# Altium PCB m13temp.PcbDoc
Units mil, origin at the board's own origin, x right, y up, seen from the top; angles counter-clockwise.
Board outline 2000 x 2600 mil, 2 copper layers (Top Layer, Bottom Layer); 29 components, 52 nets, 118 pads, 16 vias.
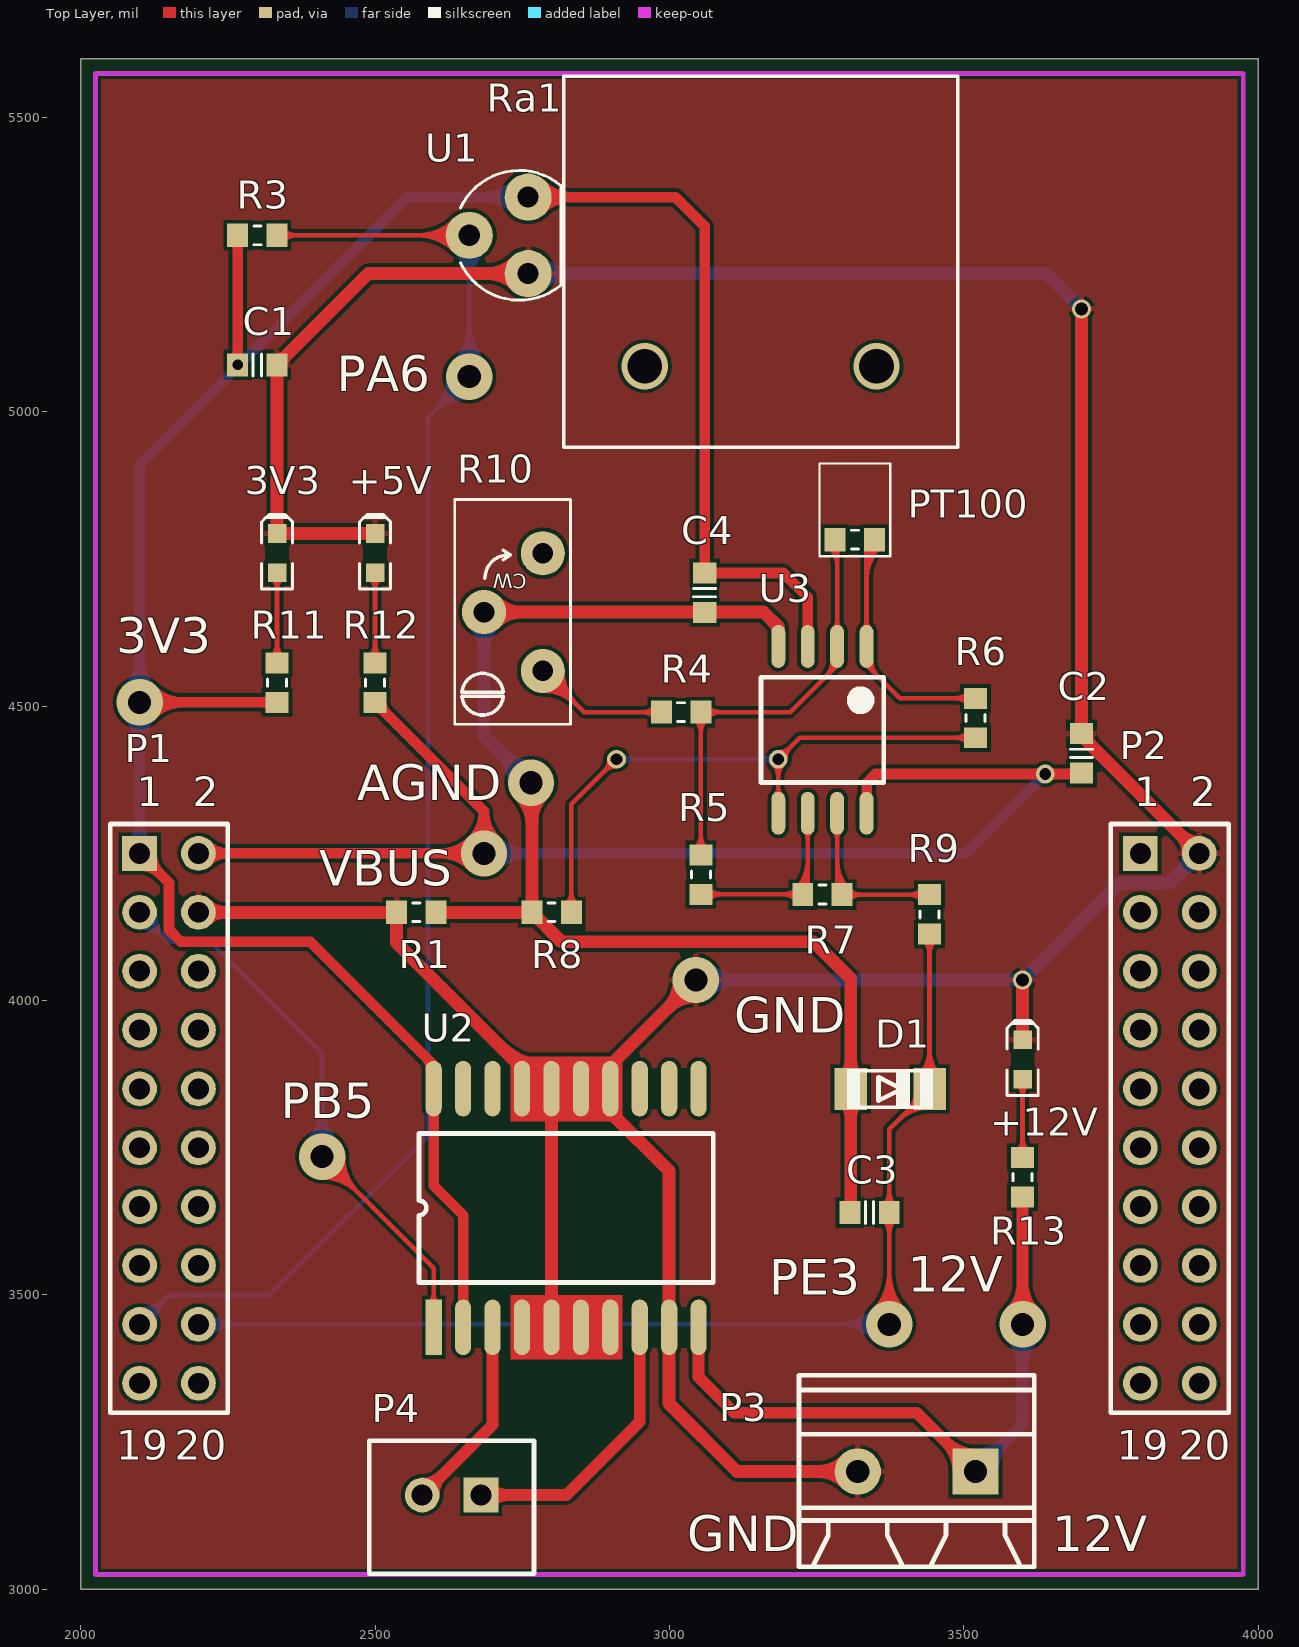
[diagram p0: Top Layer view]
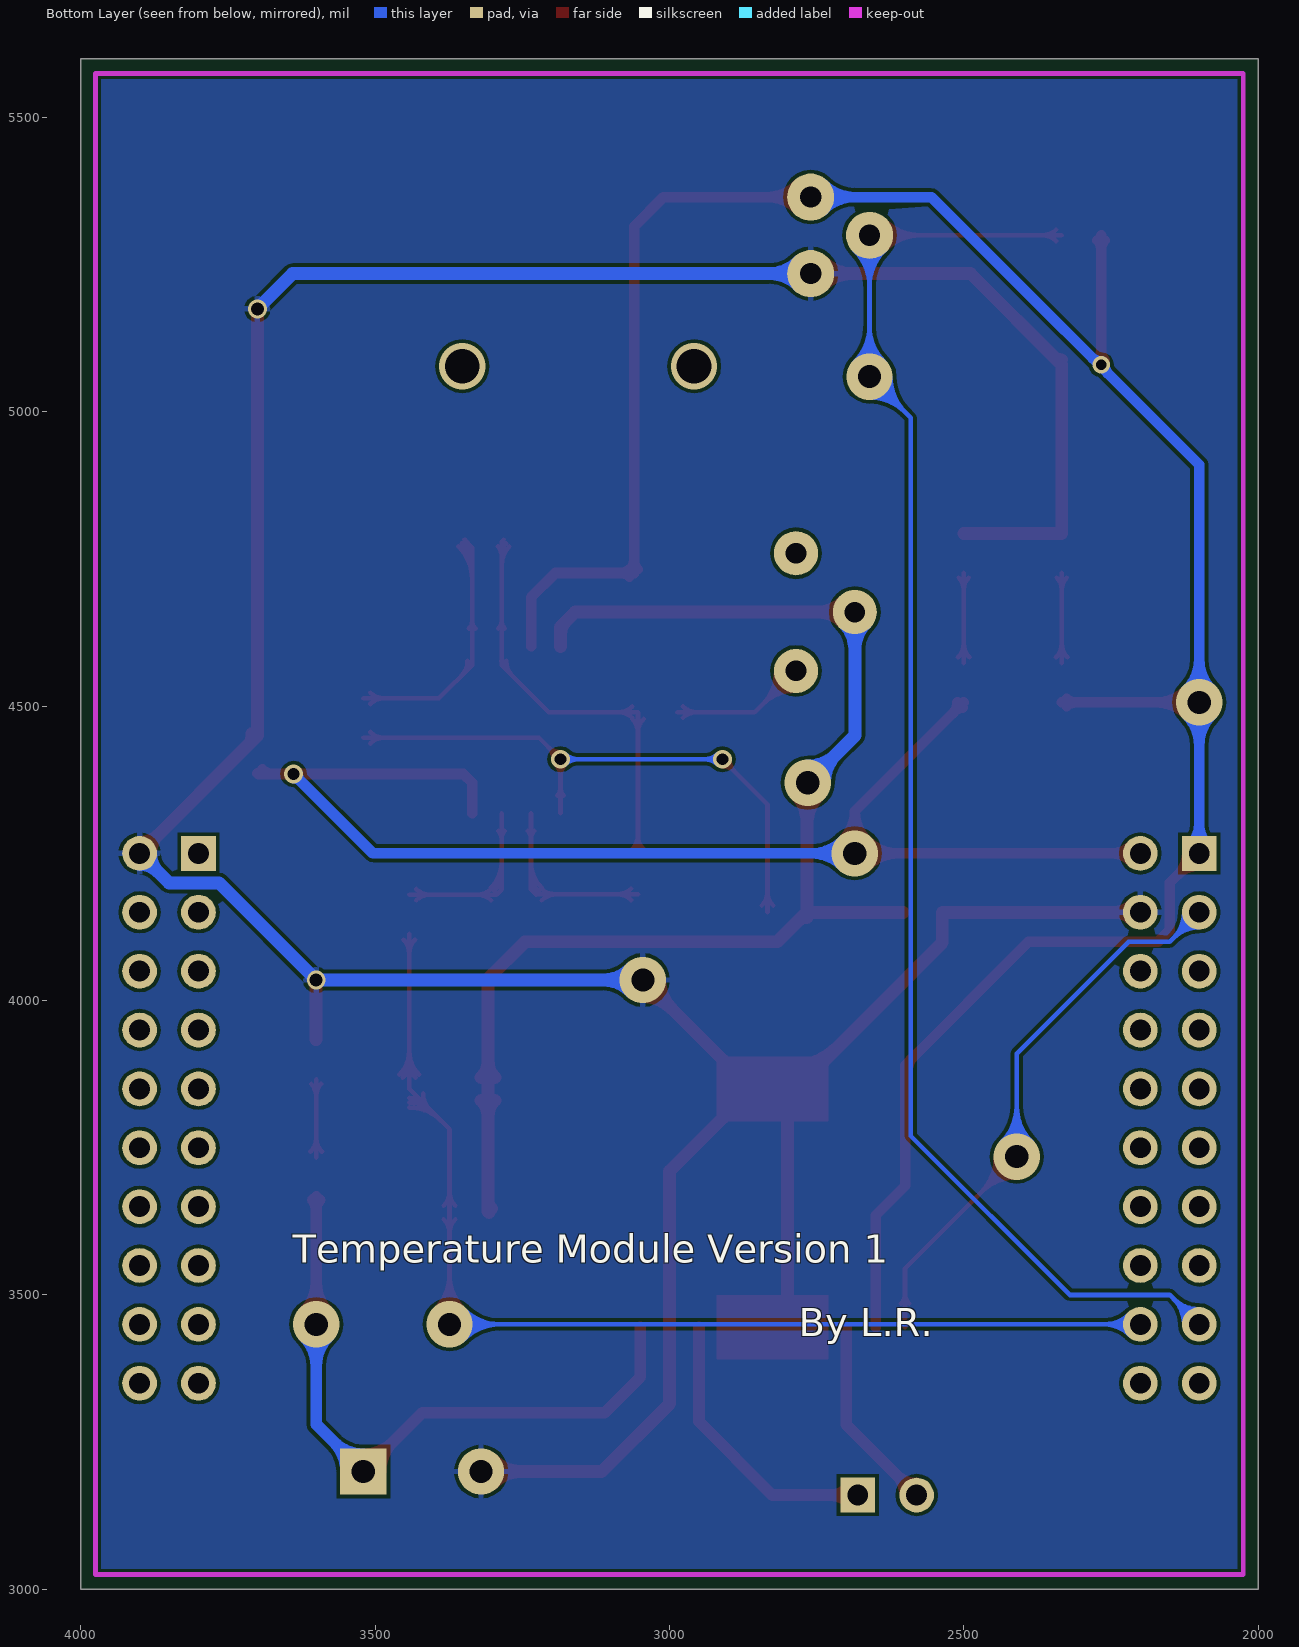
[diagram p1: Bottom Layer view, seen from below]
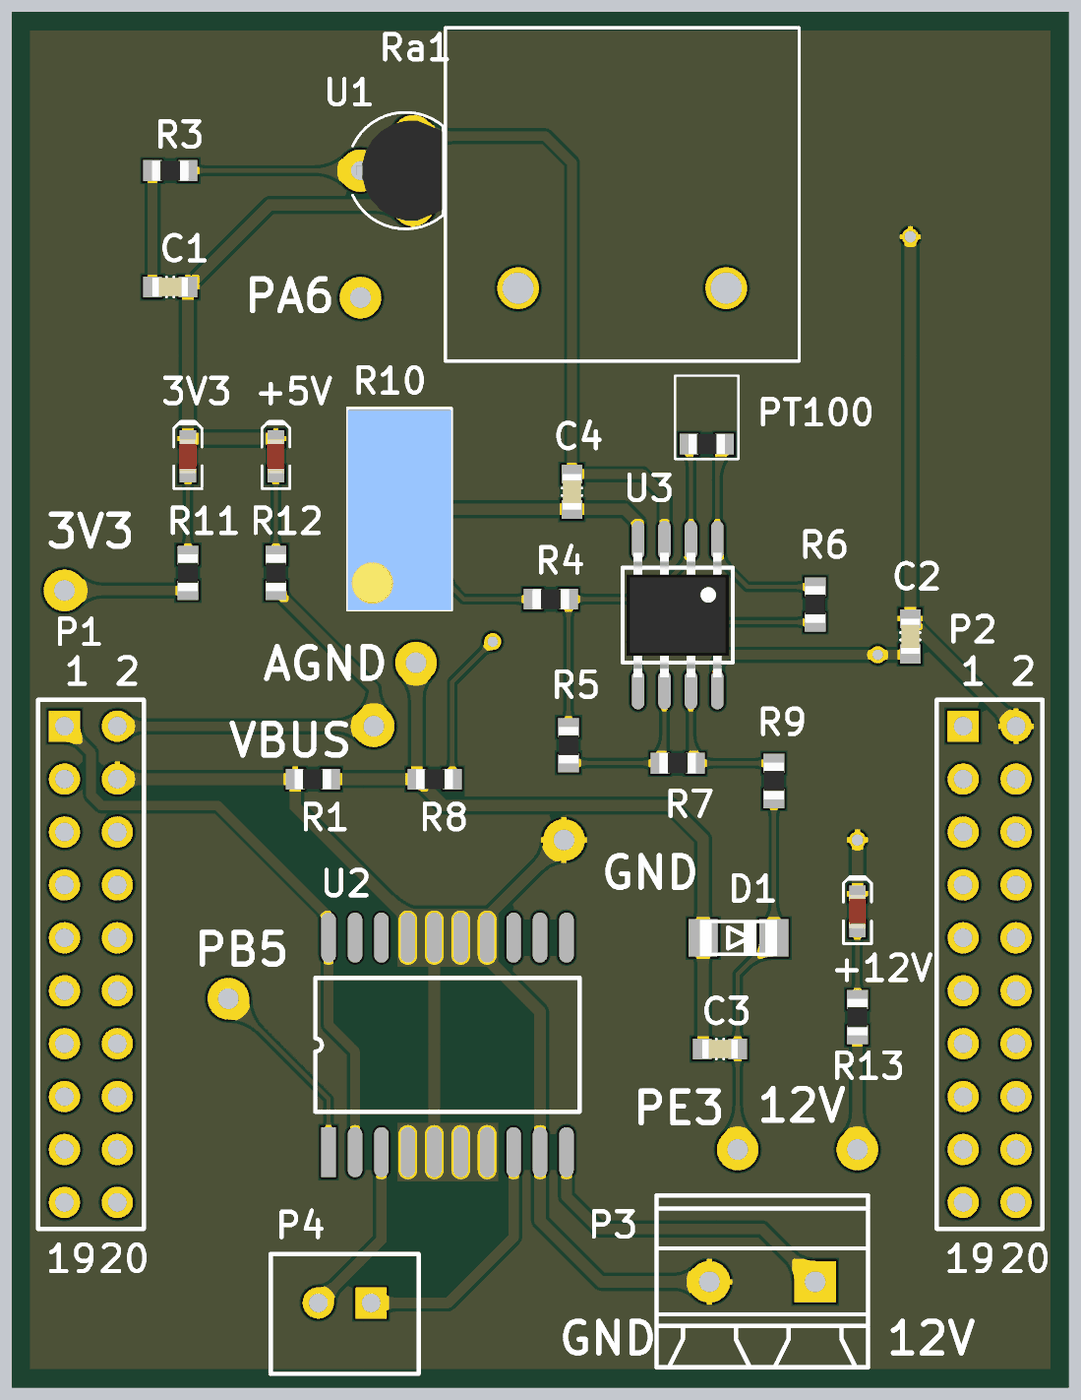
[diagram p2: 3D render of the assembled board from above, using the file's embedded part models]

## Layer stack, top to bottom
Top Layer: signal copper 1.4
Dielectric: dielectric 12.6, FR-4, Dk 4.8
Bottom Layer: signal copper 1.4

## Board outline
2000,3000 4000,3000 4000,5600 2000,5600

## Design rules (kind name [scope] priority, off if disabled: settings)
Clearance [All] p1: gap=6
PolygonConnect [All] p1: connectstyle=Relief reliefconductorwidth=10 reliefentries=4 polygonreliefangle="90 Angle"
RoutingVias VSS [(InNet('AGND') OR InNet('GND'))] p1: holewidth=22 width=32 viastyle="Through Hole" minholewidth=20 minwidth=32 maxholewidth=40 maxwidth=80
RoutingVias 5V [(InNet('3V3') OR InNet('OUT1') OR InNet('OUT2') OR InNet('V12') OR InNet('VBUS'))] p2: holewidth=18 width=30 viastyle="Through Hole" minholewidth=18 minwidth=30 maxholewidth=40 maxwidth=80
RoutingVias [All] p3: holewidth=12 width=24 viastyle="Through Hole" minholewidth=12 minwidth=24 maxholewidth=40 maxwidth=80
SilkscreenOverComponentPads [All] p1: minsilkscreentomaskgap=10
SolderMaskExpansion [All] p1: expansion=4
Width V12 [(InNet('V12') OR InNet('OUT1') OR InNet('OUT2'))] p1: maxlimit=20 minlimit=20 preferedwidth=20
Width GND [(InNet('AGND') OR InNet('GND'))] p2: maxlimit=22 minlimit=22 preferedwidth=22
Width VCC [(InNet('3V3') OR InNet('VBUS'))] p3: maxlimit=18 minlimit=11 preferedwidth=18
Width [All] p4: maxlimit=8 minlimit=8 preferedwidth=8
27 further rules are at their usual default settings.

## Components (designator, comment, footprint, x,y, rotation, side; value= is the part's Value field where it differs from the comment)
3V3 "LED2" LED_0603_RED 2333.47,4760 r90 top
+5V "LED2" LED_0603_RED 2500,4760 r90 top
+12V "LED2" LED_0603_RED 3600,3900 r90 top
C1 "Cap Semi" CAP_0603 2300,5080 r180 top
C2 "Cap Semi" CAP_0603 3700,4420 r90 top
C3 "Cap Semi" CAP_0603 3340,3640 r0 top
C4 "Cap Semi" CAP_0603 3060,4693 r270 top
D1 "1N4728" DIAO 3380,3860 r180 top
P1 "Header 10X2" HDR2X10 2100,4250 r270 top
P2 "Header 10X2" HDR2X10 3800,4250 r270 top
P3 "Header 2" MKDSN_2RMI 3520,3200 r180 top
P4 "Header2" XPH2 2680,3160 r180 top
PT100 "PT100" PT100 3280,4780 r0 top
R1 "Res Semi" RES_0603 2570,4150 r0 top
R3 "Res Semi" RES_0603 2300,5300 r0 top
R4 "Res Semi" RES_0603 3020,4490 r180 top
R5 "Res Semi" RES_0603 3053.47,4214 r270 top
R6 "Res Semi" RES_0603 3520,4480 r270 top
R7 "Res Semi" RES_0603 3260,4180 r0 top
R8 "Res Semi" RES_0603 2800,4150 r0 top
R9 "Res Semi" RES_0603 3441.93,4146.5 r90 top
R10 "Res_Trimmer" RES_TRIMMER 2785,4560 r180 top
R11 "Res Semi" RES_0603 2333.47,4540 r90 top
R12 "Res Semi" RES_0603 2500,4540 r90 top
R13 "Res Semi" RES_0603 3600,3700 r90 top
Ra1 "Radiation" Radiation 2840,4940 r0 top
U1 "DS18B20" TO-92 2760,5300 r180 top
U2 "L293DD" SOP20 2600,3445 r90 top
U3 "LM358DR" SOIC_8 3260,4460 r270 top

## Footprints (in the part's own frame and the unit in brackets; to place one, negate y for a bottom-side part, rotate by r counter-clockwise, add the part's x,y. Pads: shape width x height; smd on the part's side, far side on the other; paste and mask are expansions set on the pad)
CAP_0603 [mm]
  rect 0.9x1 smd: 1(-0.85,0) 2(0.85,0)
  Top Layer pour cut-out: -0.4,0.6 0.4,0.6 0.4,-0.6 -0.4,-0.6
  silkscreen extent -0.18,-0.48 0.18,0.48, body extent -0.85,-0.45 0.85,0.45, height 0.89
DIAO [mm]
  rect 1.4x1.8 smd: 1(1.827,0.254) 2(-1.573,0.254)
  silkscreen extent -1.73,-0.61 1.98,1.12
HDR2X10 [mm] "Connector; Header; 10x2 Position"
  rect 1.5x1.5 hole 0.9: 1(0,0)
  round 1.5 hole 0.9: 2(0,2.54) 3(2.54,0) 4(2.54,2.54) 5(5.08,0) 6(5.08,2.54) 7(7.62,0) 8(7.62,2.54) 9(10.16,0) 10(10.16,2.54) 11(12.7,0) 12(12.7,2.54) 13(15.24,0) 14(15.24,2.54) 15(17.78,0) 16(17.78,2.54) 17(20.32,0) 18(20.32,2.54) 19(22.86,0) 20(22.86,2.54)
  silkscreen extent -1.27,-1.27 24.13,3.81
LED_0603_RED [mm]
  rect 0.8x0.8 smd: 1(-0.85,0) 2(0.85,0)
  Top Layer pour cut-out: -0.5,0.5 0.5,0.5 0.5,-0.5 -0.5,-0.5
  silkscreen extent -1.55,-0.68 1.68,0.67, body extent -0.8,-0.4 0.8,0.4, height 0.75
MKDSN_2RMI [mm]
  rect 2x2 hole 1: 1(0,0)
  round 2 hole 1: 2(5.08,0)
  silkscreen extent -2.54,-4.15 7.62,4.11
PT100 [mm]
  rect 0.9x1 smd: 1(0.039,0.076) 2(1.739,0.076)
  Top Layer pour cut-out: 0.489,0.676 1.289,0.676 1.289,-0.524 0.489,-0.524
  silkscreen extent -0.64,-0.64 2.41,3.36, body extent 0.01,-0.4 1.76,0.55, height 0.54
Radiation [mil]
  silkscreen extent -20,0 650,630
RES_0603 [mm]
  rect 0.9x1 smd: 1(-0.85,0) 2(0.85,0)
  Top Layer pour cut-out: -0.4,0.6 0.4,0.6 0.4,-0.6 -0.4,-0.6
  silkscreen extent -0.15,-0.41 0.15,0.41, body extent -0.87,-0.47 0.88,0.48, height 0.54
RES_TRIMMER [mil] "TRIMMER, MURATA, PV36Y"
  round 75 hole 35: 1(0,0) 2(100,-100) 3(0,-200)
  silkscreen extent -47,-291 150,91, body extent -47,-287 150,91, height 445
SOIC_8 [mm] "SOIC, 8-Leads, Body 5.3x5.4mm (max), Pitch 1.27mm, IPC Medium Density"
  oval 1.85x0.6 smd: 1(-3.6,1.905) 2(-3.6,0.635) 3(-3.6,-0.635) 4(-3.6,-1.905) 5(3.6,-1.905) 6(3.6,-0.635) 7(3.6,0.635) 8(3.6,1.905)
  silkscreen extent -2.28,-2.65 2.27,2.65, body extent -3,-2.45 3,2.45, height 1.75
SOP20 [mm]
  rect 2.4x0.7 smd: 1(0,0.01)
  oval 2.4x0.7 smd: 2(0,-1.26) 3(0,-2.53) 4(0,-3.8) 5(0,-5.07) 6(0,-6.34) 7(0,-7.61) 8(0,-8.88) 9(0,-10.15) 10(0,-11.42) 11(10.3,-11.42) 12(10.3,-10.15) 13(10.3,-8.88) 14(10.3,-7.61) 15(10.3,-6.34) 16(10.3,-5.07) 17(10.3,-3.8) 18(10.3,-2.53) 19(10.3,-1.26) 20(10.3,0.01)
  silkscreen extent 1.93,-12.06 8.37,0.64
TO-92 [mil]
  round 80 hole 36: 1(0,65) 2(100,0) 3(0,-65)
  silkscreen extent -56,-110 115,110, body extent -55,-95 107,95, height 405
XPH2 [mm]
  rect 1.5x1.5 hole 0.9: 1(0,0)
  round 1.5 hole 0.9: 2(2.54,0)
  silkscreen extent -2.29,-2.35 4.83,3.4

## Part data
3V3 +5V +12V: "Typical RED, GREEN, YELLOW, AMBER GaAs LED"
C1 C2 C3 C4: "Capacitor (Semiconductor SIM Model)"
D1: library part "Diode 1N4148", "High Conductance Fast Diode"
P1 P2: "Header, 10-Pin, Dual row"
P3: "Header, 2-Pin"
PT100: library part "Res Adj1", "Variable Resistor"
R1 R3 R4 R5 R6 R7 R8 R9 R11 R12 R13: "Semiconductor Resistor"
R10: "Resistor"
U1: "Programmable Resolution  1-Wire Digital Thermometer"
U2: "L293DD MOTOR"
U3: "Dual Operational Amplifiers"

## Via types
v1: diameter 78.74, hole 39.37, Top Layer to Bottom Layer, 8 vias
v2: diameter 32, hole 20, Top Layer to Bottom Layer, 3 vias
v3: diameter 32, hole 22, Top Layer to Bottom Layer, 2 vias
v4: diameter 78.74, hole 59.06, Top Layer to Bottom Layer, 2 vias
v5: diameter 30, hole 18, Top Layer to Bottom Layer, 1 vias

## Nets (pads, with @x,y where several pads share a name; then routed paths per layer and width w, separated by ;. In a path a pad name is that pad's centre, name@x,y a point inside that pad or via, vN(x,y) a via of type N, cw(c..) or ccw(c..) an arc to the next point about the centre after c; other vN are vias at no path point)
3V3: C1.2 C4.1 P1.1 R3.1 R11.1 U1.3 U2.2 U2.20 U3.3 | length 5273.9
  Top Layer w18: P1.1@2100,4229.47 cw(c2100,4179.91) 2135.04,4214.96 cw(c2170.09,4250) P1.1@2120.53,4250 ; P1.1 2150,4200 2150,4120 2170,4100 2390,4100 2599.61,3890.39 U2.20 2599.61,3685.39 2649.61,3635.39 U2.2 ; v1(2100,4506.53) R11.1 ; v1@2121.47,4485.06 cw(c2173.32,4433.22) 2173.32,4506.54 cw(c2173.32,4579.85) v1@2121.47,4528.01 ; C1.2@2260.37,5088.13 ccw(c2245.49,5103.01) 2266.53,5103.01 ccw(c2287.58,5103.01) C1.2@2272.7,5088.13 ; R3.1@2260.37,5291.87 cw(c2245.49,5276.99) 2266.53,5276.99 cw(c2287.58,5276.99) R3.1@2272.7,5291.87 ; v5(2266.54,5080) R3.1 ; R11.1@2325.33,4500.37 ccw(c2310.45,4485.49) 2310.45,4506.53 ccw(c2310.45,4527.58) R11.1@2325.33,4512.7 ; 2586.91,3903.09 cw(c2567.8,3883.98) U2.20@2594.83,3883.98 ; U1.3@2755,5370 U1.3 3010,5365 3060,5315 C4.1 3193.53,4726.47 3235,4685 U3.3 ; U1.3@2781.92,5343.08 cw(c2834.84,5290.16) 2834.84,5365 cw(c2834.84,5439.84) U1.3@2781.92,5386.92 ; C4.1@3053.84,4732.63 ccw(c3038.96,4747.51) 3060,4747.51 ccw(c3081.04,4747.51) C4.1@3066.16,4732.63 ; C4.1@3068.13,4720.3 cw(c3083.01,4705.42) 3083.01,4726.47 cw(c3083.01,4747.51) C4.1@3068.13,4732.63
  Bottom Layer w18: v1@2078.53,4485.06 cw(c2026.68,4433.22) 2100,4433.22 cw(c2173.32,4433.22) v1@2121.47,4485.06 ; v1@2078.53,4528.01 ccw(c2026.68,4579.85) 2100,4579.85 ccw(c2173.32,4579.85) v1@2121.47,4528.01 ; P1.1@2085.48,4264.52 ccw(c2050.44,4299.56) 2100,4299.56 ccw(c2149.56,4299.56) P1.1@2114.52,4264.52 ; P1.1 v1(2100,4506.53) 2100,4910 2555,5365 U1.3 ; 2253.84,5063.84 ccw(c2237.69,5080) v5@2260.54,5080 ; v5@2266.54,5086 ccw(c2266.54,5108.85) 2282.69,5092.69 ; U1.3@2738.08,5343.08 ccw(c2685.16,5290.16) 2685.16,5365 ccw(c2685.16,5439.84) U1.3@2738.08,5386.92
AGND: C3.1 C4.2 D1.1 R1.2 R8.1 R10.2 U3.4 | length 2827.3
  Top Layer w22: R1.2 R8.1 ; R10.2 3160,4660 3185,4635 U3.4 ; R10.2@2703.74,4641.26 cw(c2748.98,4596.02) 2748.98,4660 cw(c2748.98,4723.98) R10.2@2703.74,4678.74 ; v1@2744.94,4349.94 cw(c2692.8,4297.8) 2766.53,4297.8 ; R8.1@2766.53,4141.32 cw(c2766.53,4120.35) R8.1@2781.36,4135.17 ; 2766.53,4305.21 cw(c2829.79,4305.21) v1@2785.06,4349.94 ; v1@2766.53,4368.47 R8.1 ; 3177.49,4642.51 cw(c3161.32,4626.34) U3.4@3184.19,4626.34 ; D1.1@3296.36,3830.42 cw(c3268.09,3802.15) 3308.07,3802.15 cw(c3348.05,3802.15) D1.1@3319.78,3830.42 ; D1.1@3296.36,3869.58 ccw(c3268.09,3897.85) 3308.07,3897.85 ccw(c3348.05,3897.85) D1.1@3319.78,3869.58 ; C3.1@3301.79,3646.72 ccw(c3286.61,3661.89) 3308.07,3661.89 ; C3.1 3308.07,3641.54 D1.1 3308.07,4036.93 3245,4100 2816.54,4100 R8.1
  Bottom Layer w22: R10.2@2666.26,4641.26 cw(c2621.02,4596.02) 2685,4596.02 cw(c2748.98,4596.02) R10.2@2703.74,4641.26 ; R10.2 2685,4450 v1(2765,4370) ; v1@2736.63,4370 ccw(c2668.14,4370) 2716.57,4418.43 ccw(c2765,4466.86) v1@2765,4398.37
GND: 3V3.2 +5V.2 +12V.2 C1.1 C2.2 P1.4 P2.2 P3.2 R1.1 U1.1 U2.4 U2.5 U2.6 U2.7 U2.9 U2.14 U2.15 U2.16 U2.17 | length 7342.3
  Top Layer w22: P1.4 R1.1 2536.53,4098.47 2784.49,3850.51 U2.16 U2.5 ; P1.4@2213.1,4136.9 cw(c2244.73,4105.27) 2244.73,4150 cw(c2244.73,4194.73) P1.4@2213.1,4163.1 ; C1.1@2333.47,5088.68 ccw(c2333.47,5109.65) C1.1@2348.29,5094.83 ; +5V.2 3V3.2 C1.1 2488.47,5235 U1.1 ; 2711.92,3923.08 ccw(c2799.61,4010.76) U2.16@2799.61,3886.76 ; U1.1@2739.49,5214.49 ccw(c2689.99,5164.99) 2689.99,5235 ccw(c2689.99,5305.01) U1.1@2739.49,5255.51 ; U2.17@2740.21,3890.65 cw(c2741.62,3884.61) U2.17@2746.01,3888.99 ; U2.17@2745.22,3869.23 cw(c2752.23,3839.3) 2773.97,3861.03 ; U2.17@2749.48,3885.52 ccw(c2799.61,3935.64) U2.16@2799.61,3864.76 ; U2.16@2787.04,3847.96 ccw(c2799.61,3860.53) U2.16@2799.61,3842.76 ; U2.14@2902.39,3817.05 ccw(c2925.16,3817.05) 2909.06,3800.94 ; U2.14@2902.39,3883.98 cw(c2922.69,3883.98) 2908.33,3898.33 ; v1@3016.63,4035 cw(c2948.14,4035) 2996.57,3986.57 cw(c3045,3938.14) v1@3045,4006.63 ; v1(3045,4035) 2899.61,3889.61 U2.14 2899.61,3810.39 2999.61,3710.39 U2.9 2999.61,3315.39 3115,3200 P3.2 ; P3.2@3299.94,3179.94 ccw(c3251.51,3131.51) 3251.51,3200 ccw(c3251.51,3268.49) P3.2@3299.94,3220.06 ; +12V.2 v3(3600,4035) ; v3(3700,5175) 3700,4450 P2.2 ; C2.2@3708.68,4453.46 ccw(c3738.01,4453.46) 3717.27,4432.73 ; P2.2@3881.47,4250 ccw(c3836.74,4250) 3868.37,4281.63 ccw(c3900,4313.26) P2.2@3900,4268.53
  Bottom Layer w22: U1.1 3640,5235 v3(3700,5175) ; U1.1@2780.51,5214.49 cw(c2830.01,5164.99) 2830.01,5235 cw(c2830.01,5305.01) U1.1@2780.51,5255.51 ; v1(3045,4035) v3(3600,4035) 3765,4200 3850,4200 P2.2 ; v1@3065.06,4014.94 cw(c3113.49,3966.51) 3113.49,4035 cw(c3113.49,4103.49) v1@3065.06,4055.06 ; P2.2@3881.47,4250 cw(c3836.74,4250) 3868.37,4218.37 cw(c3900,4186.74) P2.2@3900,4231.47
Net3V3_1: 3V3.1 R11.2 | length 249.6
  Top Layer w8: R11.2@2323.77,4583.16 ccw(c2300.34,4606.58) 2333.47,4606.58 ; 3V3.1@2325.16,4718.23 cw(c2305.1,4698.17) 2333.47,4698.17 cw(c2361.83,4698.17) 3V3.1@2341.77,4718.23 ; R11.2 3V3.1 ; 2333.47,4606.57 ccw(c2366.57,4606.57) R11.2@2343.16,4583.16
Net+5V_1: +5V.1 R12.2 | length 249.6
  Top Layer w8: R12.2@2490.3,4583.16 ccw(c2466.88,4606.58) 2500,4606.58 ; +5V.1@2491.69,4718.23 cw(c2471.64,4698.17) 2500,4698.17 cw(c2528.36,4698.17) +5V.1@2508.31,4718.23 ; R12.2 +5V.1 ; 2500,4606.57 ccw(c2533.11,4606.57) R12.2@2509.7,4583.16
Net+12V_1: +12V.1 R13.2 | length 229.6
  Top Layer w8: R13.2@3590.3,3743.16 ccw(c3566.88,3766.58) 3600,3766.58 ; +12V.1@3591.69,3858.23 cw(c3571.64,3838.17) 3600,3838.17 cw(c3628.36,3838.17) +12V.1@3608.31,3858.23 ; R13.2 +12V.1 ; 3600,3766.57 ccw(c3633.11,3766.57) R13.2@3609.7,3743.16
NetPT100_1: PT100.1 R4.1 R5.1 U3.2 | length 1020.9
  Top Layer w8: R5.1@3043.77,4257.16 ccw(c3020.35,4280.58) 3053.47,4280.58 ccw(c3086.58,4280.58) R5.1@3063.16,4257.16 ; R4.1@3043.77,4478.33 cw(c3020.35,4454.92) 3053.47,4454.92 cw(c3086.58,4454.92) R4.1@3063.16,4478.33 ; R5.1 R4.1 3205,4490 3285,4570 U3.2 3285,4779.54 PT100.1 ; R4.1@3063.16,4480.3 cw(c3086.58,4456.88) 3086.58,4490 cw(c3086.58,4523.11) R4.1@3063.16,4499.7 ; 3266.63,4551.63 ccw(c3241.13,4577.13) U3.2@3277.19,4577.13 ; PT100.1@3271.84,4771.33 cw(c3240.06,4739.55) 3285,4739.55 ; PT100.1@3277.49,4776.99 cw(c3259.37,4758.87) 3285,4758.87 ; U3.2@3279.48,4631.86 ccw(c3266.14,4645.2) 3285,4645.2 ccw(c3303.86,4645.2) U3.2@3290.52,4631.86 ; 3280.28,4565.28 ccw(c3268.44,4577.13) U3.2@3285.19,4577.13 ; 3285,4756.28 cw(c3306.29,4756.28) PT100.1@3291.23,4771.33
NetPT100_2: PT100.2 R6.1 U3.1 | length 690.9
  Top Layer w8: U3.1@3329.48,4631.86 ccw(c3316.14,4645.2) 3335,4645.2 ccw(c3353.86,4645.2) U3.1@3340.52,4631.86 ; U3.1@3334.81,4577.13 ccw(c3351.56,4577.13) 3339.72,4565.28 ; 3335,4715.41 cw(c3414.09,4715.41) PT100.2@3358.16,4771.33 ; 3335,4734.72 cw(c3394.77,4734.72) PT100.2@3352.51,4776.99 ; 3335,4754.04 cw(c3375.46,4754.04) PT100.2@3346.85,4782.65 ; U3.1@3342.81,4577.13 ccw(c3378.87,4577.13) 3353.37,4551.63 ; PT100.2 3335,4769.54 U3.1 3335,4570 3391.53,4513.47 R6.1 ; R6.1@3508.33,4503.77 ccw(c3484.92,4480.35) 3484.92,4513.47 ccw(c3484.92,4546.58) R6.1@3508.33,4523.16
NetR4_2: R4.2 R10.1 | length 572.7
  Top Layer w8: R10.1@2785,4526.5 cw(c2785,4445.62) 2842.19,4502.81 cw(c2899.38,4560) R10.1@2818.5,4560 ; R10.1@2785,4534.5 cw(c2785,4472.94) 2828.53,4516.47 cw(c2872.06,4560) R10.1@2810.5,4560 ; R10.1@2785,4542.5 cw(c2785,4500.25) 2814.87,4530.13 cw(c2844.75,4560) R10.1@2802.5,4560 ; R10.1 2855,4490 R4.2 ; R4.2@2976.84,4480.3 ccw(c2953.42,4456.88) 2953.42,4490 ccw(c2953.42,4523.11) R4.2@2976.84,4499.7
NetR5_2: R5.2 R7.1 U3.6 | length 530.2
  Top Layer w8: R5.2 R7.1@3226,4180.54 ; R5.2@3065.13,4170.84 cw(c3088.55,4147.42) 3088.55,4180.54 cw(c3088.55,4213.65) R5.2@3065.13,4190.23 ; 3192.13,4180.54 cw(c3192.13,4145.6) R7.1@3216.84,4170.3 ; 3194.71,4180.54 ccw(c3194.71,4211.83) R7.1@3216.84,4189.7 ; R7.1@3216.84,4191.67 ccw(c3172.98,4235.52) 3235,4235.52 ; R7.1@3222.49,4186.01 ccw(c3192.3,4216.21) 3235,4216.21 ; R7.1 3235,4188.47 U3.6 ; U3.6@3229.48,4288.14 cw(c3216.14,4274.8) 3235,4274.8 cw(c3253.86,4274.8) U3.6@3240.52,4288.14
NetR6_2: R6.2 R8.2 U3.5 | length 1369.8
  Top Layer w8: R8.2@2823.77,4161.67 ccw(c2800.35,4185.08) 2833.46,4185.08 ccw(c2866.58,4185.08) R8.2@2843.16,4161.67 ; R8.2 2833.46,4333.46 v2(2910,4410) ; v2@2898,4410 cw(c2869.03,4410) 2889.51,4389.51 cw(c2910,4369.03) v2@2910,4398 ; v2@3176.51,4401.51 cw(c3156.03,4381.03) 3185,4381.03 cw(c3213.97,4381.03) v2@3193.49,4401.51 ; U3.5@3179.48,4348.4 ccw(c3166.14,4361.73) 3185,4361.73 ccw(c3203.86,4361.73) U3.5@3190.52,4348.4 ; U3.5 v2(3185,4410) 3221.54,4446.54 R6.2 ; v2@3185,4422 ccw(c3185,4450.97) 3205.49,4430.49 ccw(c3225.97,4410) v2@3197,4410 ; R6.2@3508.33,4436.84 ccw(c3484.92,4413.42) 3484.92,4446.54 ccw(c3484.92,4479.65) R6.2@3508.33,4456.23
  Bottom Layer w8: v2(2910,4410) v2(3185,4410) ; v2@2918.49,4401.51 cw(c2938.97,4381.03) 2938.97,4410 cw(c2938.97,4438.97) v2@2918.49,4418.49 ; v2@3176.51,4401.51 ccw(c3156.03,4381.03) 3156.03,4410 ccw(c3156.03,4438.97) v2@3176.51,4418.49
NetR7_2: R7.2 R9.2 U3.7 | length 506.1
  Top Layer w8: U3.7@3279.48,4288.14 cw(c3266.14,4274.8) 3285,4274.8 cw(c3303.86,4274.8) U3.7@3290.52,4288.14 ; 3285,4216.21 ccw(c3327.7,4216.21) R7.2@3297.51,4186.01 ; 3285,4235.52 ccw(c3347.02,4235.52) R7.2@3303.16,4191.67 ; U3.7 3285,4188.47 R7.2 R9.2 ; R7.2@3303.16,4170.3 cw(c3326.58,4146.89) 3326.58,4180 cw(c3326.58,4213.12) R7.2@3303.16,4189.7 ; 3406.76,4180 cw(c3406.76,4146.76) R9.2@3430.26,4170.27 ; 3406.93,4180 ccw(c3406.93,4212.99) R9.2@3430.26,4189.66
OUT1: P4.2 U2.3 | length 408.6
  Top Layer w20: P4.2 2699.61,3279.61 U2.3 ; P4.2@2580,3179.53 ccw(c2580,3226.67) 2613.34,3193.34 ccw(c2646.67,3160) P4.2@2599.53,3160
OUT2: P4.1 U2.8 | length 555.7
  Top Layer w20: P4.1 2825,3160 2949.61,3284.61 U2.8 ; P4.1@2693.81,3146.19 cw(c2727.14,3112.86) 2727.14,3160 cw(c2727.14,3207.14) P4.1@2693.81,3173.81
PA2: P2.20
PA3: P2.18
PA4: P2.16
PA5: P1.15
PA6: P1.17 R3.2 U1.2 | length 3983.2
  Top Layer w8: R3.2 U1.2 ; R3.2@2343.16,5290.3 cw(c2366.58,5266.89) 2366.58,5300 cw(c2366.58,5333.12) R3.2@2343.16,5309.7 ; U1.2@2634.54,5274.54 ccw(c2573.09,5213.09) 2573.09,5300 ccw(c2573.09,5386.91) U1.2@2634.54,5325.46 ; U1.2@2640.2,5280.2 ccw(c2592.4,5232.4) 2592.4,5300 ccw(c2592.4,5367.6) U1.2@2640.2,5319.8 ; U1.2@2645.86,5285.86 ccw(c2611.71,5251.71) 2611.71,5300 ccw(c2611.72,5348.28) U1.2@2645.86,5314.14
  Bottom Layer w8: P1.17 2150,3500 2320,3500 2590,3770 2590,4990 v1(2660,5060) U1.2 ; P1.17@2100,3467.53 ccw(c2100,3509.84) 2129.92,3479.92 ccw(c2159.84,3450) P1.17@2117.53,3450 ; P1.17@2100,3475.53 ccw(c2100,3537.16) 2143.58,3493.58 ccw(c2187.16,3450) P1.17@2125.53,3450 ; v1@2624.63,5060 cw(c2539.24,5060) 2599.62,4999.62 cw(c2660,4939.24) v1@2660,5024.63 ; v1@2632.63,5060 cw(c2566.55,5060) 2613.28,5013.28 cw(c2660,4966.55) v1@2660,5032.63 ; U1.2@2634.54,5274.54 cw(c2573.09,5213.09) 2660,5213.09 cw(c2746.91,5213.09) U1.2@2685.46,5274.54 ; v1@2634.99,5085.01 ccw(c2574.61,5145.39) 2660,5145.39 ccw(c2745.39,5145.39) v1@2685.01,5085.01 ; U1.2@2640.2,5280.2 cw(c2592.4,5232.4) 2660,5232.4 cw(c2727.6,5232.4) U1.2@2679.8,5280.2 ; v1@2640.63,5060 cw(c2593.87,5060) 2626.93,5026.93 cw(c2660,4993.87) v1@2660,5040.63 ; v1@2640.65,5079.35 ccw(c2593.92,5126.08) 2660,5126.08 ccw(c2726.08,5126.08) v1@2679.35,5079.35 ; U1.2@2645.86,5285.86 cw(c2611.72,5251.72) 2660,5251.72 cw(c2708.28,5251.72) U1.2@2674.14,5285.86 ; v1@2646.3,5073.7 ccw(c2613.24,5106.76) 2660,5106.76 ccw(c2706.76,5106.76) v1@2673.7,5073.7
PA7: P1.19
PB0: P1.5
PB1: P1.7
PB2: P2.4
PB3: P2.5
PB4: P1.13
PB5: P1.3 U2.1 | length 1776.1
  Top Layer w8: v1@2410,3699.63 cw(c2410,3614.24) 2470.38,3674.62 cw(c2530.76,3735) v1@2445.37,3735 ; v1@2410,3707.63 cw(c2410,3641.55) 2456.72,3688.28 cw(c2503.45,3735) v1@2437.37,3735 ; v1@2410,3715.63 cw(c2410,3668.87) 2443.07,3701.93 cw(c2476.13,3735) v1@2429.37,3735 ; v1(2410,3735) 2599.61,3545.39 U2.1 ; U2.1@2592.69,3485.38 ccw(c2576,3502.07) 2599.61,3502.07 ccw(c2623.22,3502.07) U2.1@2606.52,3485.38
  Bottom Layer w8: P1.3@2100,4124.47 cw(c2100,4062.84) 2143.58,4106.42 cw(c2187.16,4150) P1.3@2125.53,4150 ; P1.3@2100,4132.47 cw(c2100,4090.16) 2129.92,4120.08 cw(c2159.84,4150) P1.3@2117.53,4150 ; P1.3 2150,4100 2220,4100 2410,3910 v1(2410,3735) ; v1@2384.99,3760.01 ccw(c2324.61,3820.39) 2410,3820.39 ccw(c2495.39,3820.39) v1@2435.01,3760.01 ; v1@2390.65,3754.35 ccw(c2343.92,3801.08) 2410,3801.08 ccw(c2476.08,3801.08) v1@2429.35,3754.35 ; v1@2396.3,3748.7 ccw(c2363.24,3781.76) 2410,3781.76 ccw(c2456.76,3781.76) v1@2423.7,3748.7
PB6: P2.14
PB7: P2.12
PC4: P2.7
PC5: P2.9
PC6: P2.11
PC7: P2.13
PD0: P1.6
PD1: P1.8
PD2: P1.10
PD3: P1.12
PD6: P2.15
PD7: P2.17
PE0: P2.6
PE1: P1.14
PE2: P1.16
PE3: C3.2 D1.2 P1.18 R9.1 | length 3118.3
  Top Layer w8: v1@3348.45,3475.01 ccw(c3288.07,3535.39) 3373.46,3535.39 ccw(c3458.86,3535.39) v1@3398.48,3475.01 ; v1@3354.11,3469.35 ccw(c3307.39,3516.08) 3373.46,3516.08 ccw(c3439.54,3516.08) v1@3392.82,3469.35 ; v1@3359.77,3463.7 ccw(c3326.7,3496.76) 3373.46,3496.76 ccw(c3420.23,3496.76) v1@3387.16,3463.7 ; C3.2@3363.77,3628.33 cw(c3340.35,3604.92) 3373.46,3604.92 cw(c3406.58,3604.92) C3.2@3383.16,3628.33 ; C3.2@3363.77,3651.67 ccw(c3340.35,3675.08) 3373.46,3675.08 ccw(c3406.58,3675.08) C3.2@3383.16,3651.67 ; v1(3373.47,3450) C3.2 3373.46,3781.53 D1.2 R9.1 ; 3388.27,3796.34 cw(c3441.93,3742.68) D1.2@3441.93,3818.57 ; 3401.93,3810 cw(c3441.93,3769.99) D1.2@3441.93,3826.57 ; 3407.28,3815.35 ccw(c3380.5,3842.13) D1.2@3418.37,3842.13 ; D1.2@3415.58,3823.65 cw(c3441.93,3797.31) D1.2@3441.93,3834.57 ; D1.2@3425.27,3874.53 ccw(c3385.06,3914.75) 3441.93,3914.75 ccw(c3498.81,3914.75) D1.2@3458.59,3874.53 ; D1.2@3430.93,3868.88 ccw(c3404.37,3895.43) 3441.93,3895.43 ccw(c3479.49,3895.44) D1.2@3452.93,3868.88 ; R9.1@3432.23,4103.34 cw(c3408.81,4079.92) 3441.93,4079.92 cw(c3475.04,4079.92) R9.1@3451.63,4103.34
  Bottom Layer w8: P1.18 v1(3373.47,3450) ; P1.18@2212.39,3437.61 cw(c2242.32,3407.68) 2242.32,3450 cw(c2242.32,3492.32) P1.18@2212.39,3462.39 ; P1.18@2218.05,3431.95 cw(c2261.63,3388.37) 2261.63,3450 cw(c2261.63,3511.63) P1.18@2218.05,3468.05 ; v1@3348.45,3424.99 ccw(c3288.07,3364.61) 3288.07,3450 ccw(c3288.07,3535.39) v1@3348.45,3475.01 ; v1@3354.11,3430.65 ccw(c3307.39,3383.92) 3307.39,3450 ccw(c3307.39,3516.08) v1@3354.11,3469.35 ; v1@3359.77,3436.3 ccw(c3326.7,3403.24) 3326.7,3450 ccw(c3326.7,3496.76) v1@3359.77,3463.7
PE4: P1.9
PE5: P1.11
PF0: P2.8
PF1: P1.20
PF2: P2.1
PF3: P2.3
PF4: P2.19
RST: P2.10
V12: P3.1 R13.1 U2.10 | length 1595.9
  Top Layer w20: U2.10 3049.61,3360.39 3110,3300 3420,3300 P3.1 ; P3.1@3490.63,3200 ccw(c3419.72,3200) 3469.86,3250.14 ccw(c3520,3300.28) P3.1@3520,3229.37 ; v1@3579.23,3470.77 ccw(c3529.09,3520.91) 3600,3520.91 ccw(c3670.91,3520.91) v1@3620.77,3470.77 ; R13.1@3594.54,3661.08 cw(c3581.37,3647.9) 3600,3647.9 cw(c3618.63,3647.91) R13.1@3605.46,3661.08 ; v1(3600,3450) R13.1
  Bottom Layer w20: P3.1 3600,3280 v1(3600,3450) ; P3.1@3520,3229.37 ccw(c3520,3300.28) 3570.14,3250.14 ccw(c3620.28,3200) P3.1@3549.37,3200 ; v1@3579.23,3429.23 cw(c3529.09,3379.09) 3600,3379.09 cw(c3670.91,3379.09) v1@3620.77,3429.23
VBUS: C2.1 P1.2 R12.1 U3.8 | length 2803.6
  Top Layer w18: P1.2 v1(2685,4250) 2685,4321.53 ; P1.2@2214.52,4235.48 cw(c2249.56,4200.44) 2249.56,4250 cw(c2249.56,4299.56) P1.2@2214.52,4264.52 ; R12.1 2685,4321.53 ; R12.1@2501.97,4497.82 cw(c2501.97,4481.53) R12.1@2513.49,4493.05 ; R12.1@2510.68,4506.53 ccw(c2536.48,4506.53) 2518.24,4488.29 ; v1@2663.53,4228.53 ccw(c2611.68,4176.68) 2611.68,4250 ccw(c2611.68,4323.32) v1@2663.53,4271.47 ; v1@2663.91,4271.85 ccw(c2615.95,4321.53) 2685,4321.53 ; v1@2706.09,4271.85 cw(c2754.05,4321.53) 2685,4321.53 ; U3.8 3335,4370 3350,4385 v2(3638.46,4385) 3698.46,4385 C2.1 ; v2@3633.51,4380.05 ccw(c3621.56,4368.1) 3621.56,4385 ccw(c3621.56,4401.9) v2@3633.51,4389.95 ; v2@3643.41,4380.05 cw(c3655.36,4368.1) 3655.36,4385 cw(c3655.36,4401.9) v2@3643.41,4389.95 ; 3673.28,4385 ccw(c3673.28,4411.28) C2.1@3691.87,4392.7
  Bottom Layer w18: v1(2685,4250) 3503.46,4250 v2(3638.46,4385) ; v1@2706.47,4228.53 cw(c2758.32,4176.68) 2758.32,4250 cw(c2758.32,4323.32) v1@2706.47,4271.47 ; v2@3631.46,4385 cw(c3614.56,4385) 3626.51,4373.05 cw(c3638.46,4361.1) v2@3638.46,4378
pads on no net: R10.3 U2.11 U2.12 U2.13 U2.18 U2.19
copper on no net:
  other v4: 2958.11,5077.8 3351.81,5077.8

## Polygon pours and split planes (outlines as drawn)
GND on Bottom Layer "Bottom Layer-No Net" (solid, remove dead copper, pour order 1000): 2000,5600 2000,3000 4000,3000 4000,5600
GND on Top Layer "Bottom Layer-No Net" (solid, remove dead copper, pour order 1001): 2000,5600 2000,3000 4000,3000 4000,5600

## Keep-outs
Keep-Out Layer:
  lines w8: 2025,3025 3975,3025 3975,5575 2025,5575 2025,3025

## Other copper
Top Layer:
  rectangle net GND: 2730,3390 2920,3500
  rectangle net GND: 2730,3795 2920,3905

## Silkscreen, mask and mechanical layers (free items; w line width, h text height)
Top Overlay:
  text "PA6" at 2435,5035 h60
  text "3V3" at 2060,4590 h60
  text "AGND" at 2470,4340 h60
  text "VBUS" at 2405,4195 h60
  text "GND" at 3110,3945 h60
  text "PB5" at 2340,3800 h60
  text "12V" at 3405,3505 h60
  text "PE3" at 3170,3500 h60
  text "GND" at 3030,3065 h60
  text "12V" at 3650,3065 h60
Bottom Overlay:
  text "Temperature Module Version 1" at 3640,3555 h48
  text "By L.R." at 2780,3430 h48

## Text inside footprints (layer, text, board x,y; h text height)
P1: Top Overlay "20" at 2160,3220 h50; Top Overlay "19" at 2060,3220 h50; Top Overlay "1" at 2095,4330 h50; Top Overlay "2" at 2190,4330 h50
P2: Top Overlay "20" at 3865,3220 h50; Top Overlay "19" at 3760,3220 h50; Top Overlay "1" at 3790,4330 h50; Top Overlay "2" at 3885,4330 h50
R10: Top Overlay "CW" at 2757.44,4725.35 h25 r180